# EAGLE board board (EAGLE 9.3.0)
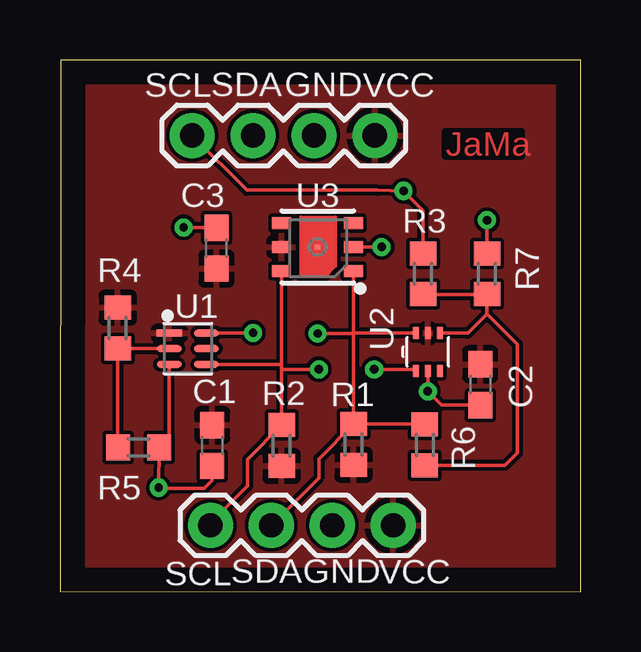
[diagram p0: board, top side]
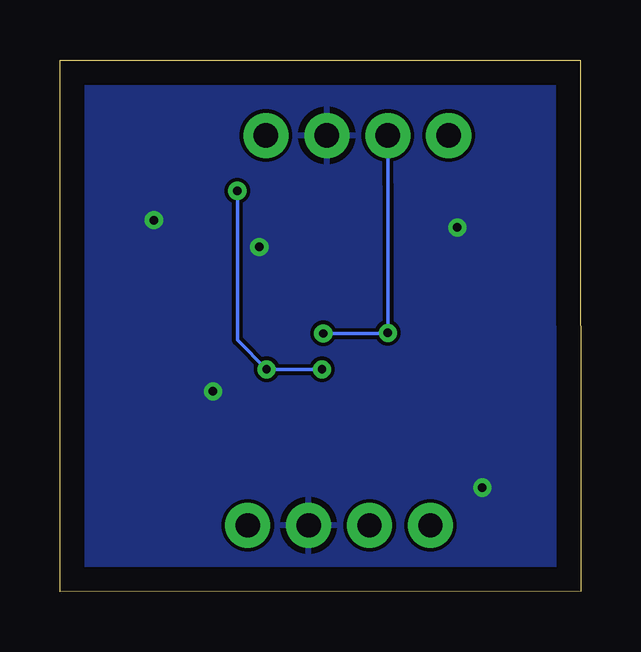
[diagram p1: board, bottom side, seen from below]

Size 21.72 x 22.17 mm. Coordinates in mm from the lower left corner, seen from the top.
Outline: 0,0.03 21.72,0 21.72,22.17 0.03,22.17 0,0.03
Copper layers (1*16): Top 0.035mm / dielectric 1.5mm / Bottom 0.035mm
Design rules "default": minimum track width 6mil, minimum drill 0.35mm, track to track 6mil, track to pad 6mil, pad to pad 6mil, via to via 6mil, smd to smd 6mil, copper to edge 40mil, drill to drill 6mil, minimum pad ring 10mil, minimum via ring 8mil, stop-mask expansion 4mil, vias tented up to drill 0mil, thermal gap 10mil

## Footprints (pad centres in the part's own frame; a part is rotated, then mirrored left to right if it is on the bottom)
C0603 = smd 1.1 x 1: 1 -0.85,0; 2 0.85,0
1X04 = drill 1.016 pad 1.88: 1 0,0; 2 2.54,0; 3 5.08,0; 4 7.62,0
R0603 = smd 1 x 1.1: 1 -0.85,0; 2 0.85,0
DFN-6-2X2 = smd 1.05 x 0.3: 1 -0.775,0.65; 2 -0.775,0; 3 -0.775,-0.65; 4 0.775,-0.65; 5 0.775,0; 6 0.775,0.65
SOT563 = smd 0.508 x 0.249: 1 -0.8,0.498; 2 -0.8,0.003; 3 -0.8,-0.506; 4 0.776,-0.506; 5 0.776,0.003; 6 0.776,0.498
DFN-6-3X3-SI7021 = smd 0.2 x 0.2: 7 0,0 | smd 0.8 x 0.5: DATA 1.5,-1; GND 1.5,0; NC@3 1.5,1; NC@4 -1.5,1; SCK -1.5,-1; VDD -1.5,0

## Placement (x,y rotation side)
C1  0.1μF  [C0603]  6.35,6.1 270 top
C2  0.1μF  [C0603]  17.53,8.64 270 top
C3  0.1μF  [C0603]  6.53,14.33 90 top
J1  [1X04]  6.27,2.77 0 top
J2  [1X04]  5.51,19.02 0 top
R1  10k  [R0603]  12.24,6.15 270 top
R2  10k  [R0603]  9.25,6.1 270 top
R3  0  [R0603]  15.14,13.26 270 top
R4  0  [R0603]  2.41,11 90 top
R5  0  [R0603]  3.28,6.02 180 top
R6  0  [R0603]  15.21,6.12 270 top
R7  0  [R0603]  17.81,13.26 90 top
U1  TSL2561FN  [DFN-6-2X2]  5.33,10.13 0 top
U2  TMP102  [SOT563]  15.34,10.01 90 top
U3  SI7021  [DFN-6-3X3-SI7021]  10.74,14.38 0 top

## Library data of the parts
C1-C3 = adafruit
J1 J2 = SparkFun-Connectors; PROD_ID: CONN-09696
R1-R7 = resistor
U1 = SparkFun-Sensors; PROD_ID: IC-11791
U2 = SparkFun-Sensors; PROD_ID: IC-09303
U3 = SparkFun-Sensors; PROD_ID: IC-13093

## Nets
ADD0: R3.2 R6.2 R7.1 U2.4
ADDR: R4.1 R5.2 U1.2
GND: C1.2 C2.2 C3.2 J1.3 J2.3 R5.1 R7.2 U1.3 U2.2 U3.GND
SCL: J1.1 J2.1 R2.1 R3.1 U1.4 U2.1 U3.SCK
SDA: J1.2 J2.2 R1.1 R6.1 U1.6 U2.6 U3.DATA
VCC: C1.1 C2.1 C3.1 J1.4 J2.4 R1.2 R2.2 R4.2 U1.1 U2.5 U3.VDD

## Tracks (layer width: path | path; a pad name or v marks a point on that pad's centre or on a via)
ADD0
  Top 0.152: R3.2 15.15,12.4 R7.1 17.8,11.58 | R6.2 18.56,5.27 19.07,5.79 19.07,10.29 19.07,10.31 17.8,11.58 | 17.8,11.58 17.01,10.78 U2.4
ADDR
  Top 0.152: U1.2 2.43,10.13 R4.1 2.41,6.03 R5.2
GND  (via drill 0.35)
  Top 0.152: v4.12,4.34 | U2.2 v15.34,8.36 15.91,7.79 C2.2 | U3.GND v13.41,14.38 | v4.12,4.34 R5.1 4.31,6.2 4.31,6.23 4.56,6.48 U1.3 | R7.2 v17.8,15.49 | C3.2 v5.16,15.18 v5.16,15.19 | C1.2 6.35,4.65 6.02,4.32 4.14,4.32 v4.12,4.34
  pour Bottom: -0.97,23.09 -0.91,-0.79 22.68,-0.81 22.73,22.78
SCL  (via drill 0.35)
  Top 0.152: U3.SCK 9.24,9.45 | 9.24,9.45 9.24,9.27 | U2.1 14.78,9.27 v13.11,9.27 | v10.79,9.27 9.24,9.27 | U1.4 9.21,9.48 9.24,9.45 | J2.1 7.8,16.74 13.23,16.74 v14.33,16.71 15.14,15.9 R3.1 | J1.1 6.27,2.87 7.82,4.42 7.82,5.52 R2.1 9.24,9.27
  Bottom 0.152: v10.79,9.27 v13.11,9.27 14.33,10.49 v14.33,16.71
SDA  (via drill 0.35)
  Top 0.152: R1.1 12.24,10.72 | R1.1 15.19,7 R6.1 | R1.1 10.79,5.55 10.79,4.75 J1.2 | U3.DATA 12.24,10.82 12.24,10.8 | 12.24,10.8 12.24,10.72 | v8.05,10.8 U1.6 | U2.6 12.26,10.78 12.24,10.8 | v10.74,10.77 12.19,10.77 12.24,10.72
  Bottom 0.152: J2.2 8.05,17.02 v8.05,10.8 8.08,10.77 v10.74,10.77
VCC
  pour Top: -0.56,22.61 -0.33,-0.41 22.35,-0.38 22.23,22.4

## Text on the board
Top: JaMa
tNames: SCL | SDA | GND | VCC | SCL | SDA | GND | VCC